# Altium PCB ICAN-7006-US.PcbDoc
Units mm, origin at the board's own origin, x right, y up, seen from the top; angles counter-clockwise.
Board outline 150 x 80 mm, 2 copper layers (Top Layer, Bottom Layer); 47 components, 131 nets, 346 pads, 0 vias.
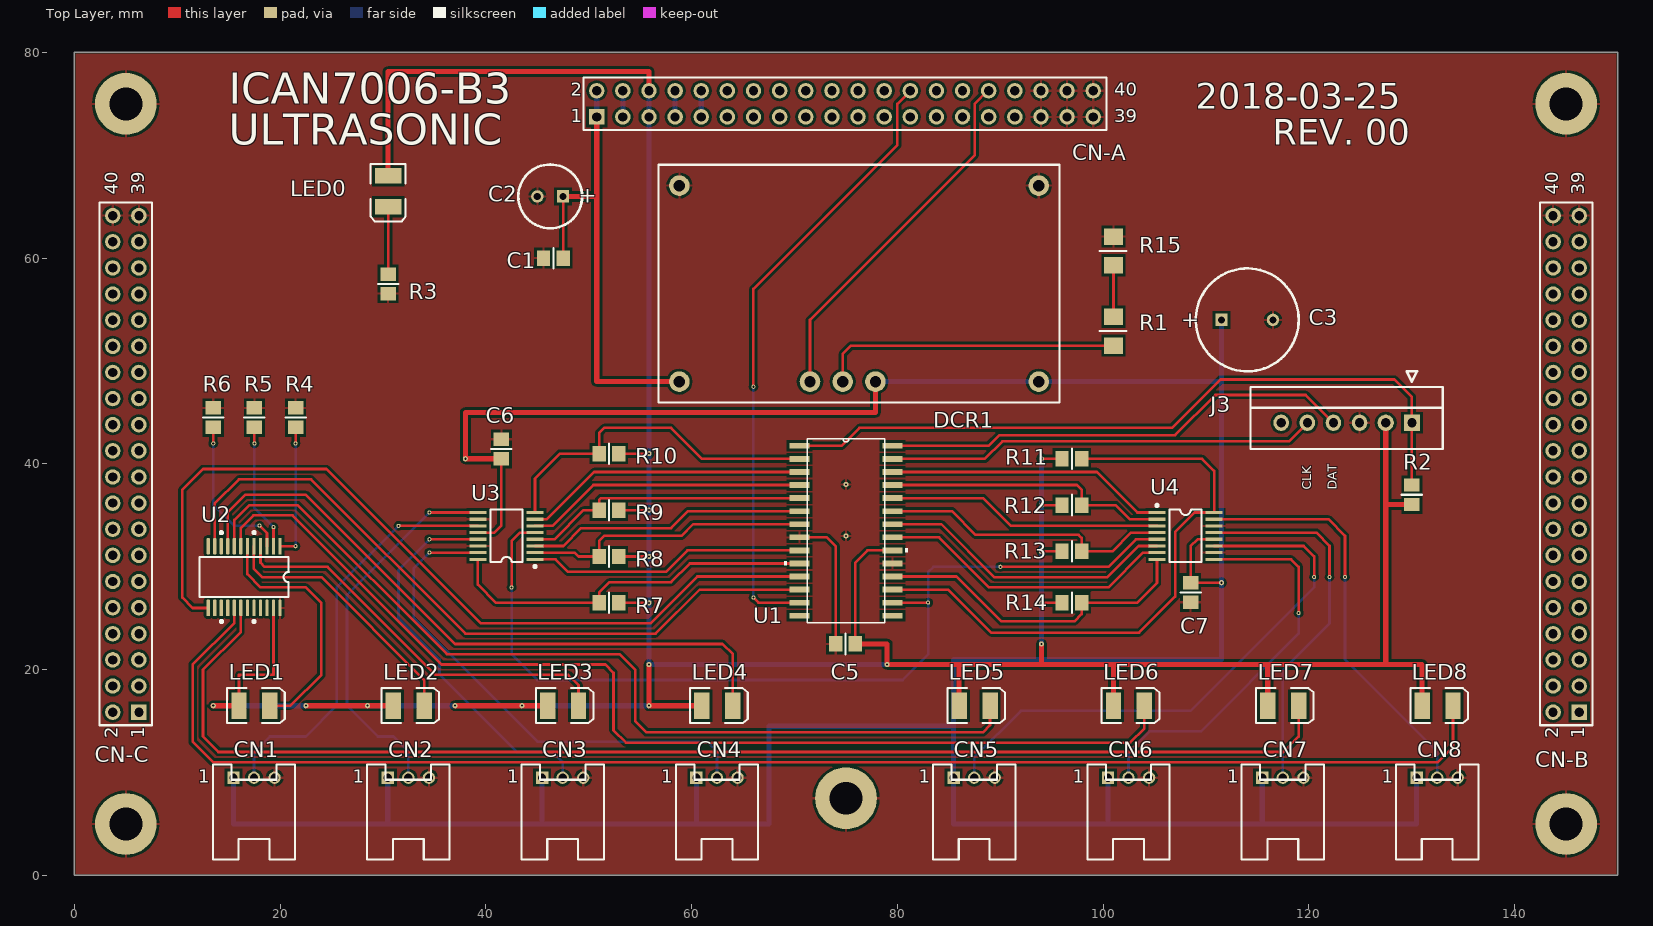
[diagram p0: Top Layer view]
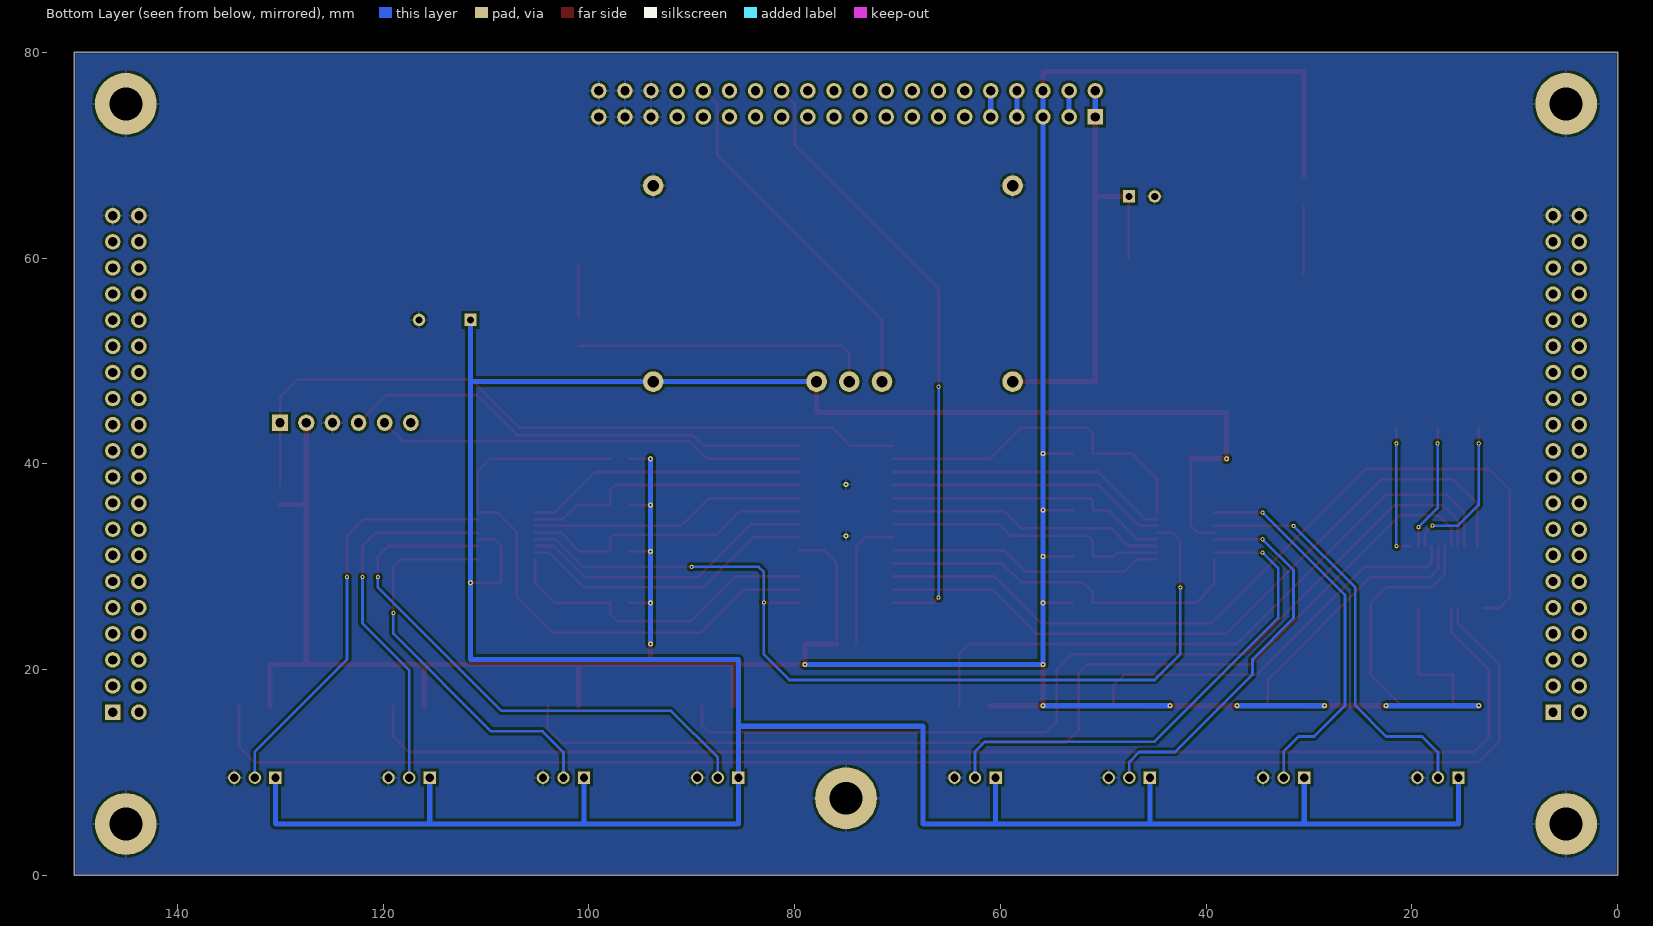
[diagram p1: Bottom Layer view, seen from below]

## Layer stack, top to bottom
Top Layer: signal copper 0.0356
Dielectric: dielectric 0.32, FR-4, Dk 4.8
Bottom Layer: signal copper 0.0356

## Board outline
0,0 0,80 150,80 150,0

## Design rules (kind name [scope] priority, off if disabled: settings)
Clearance [All] p1: gap=0.254
ComponentClearance [All] p1: gap=0.254 collisioncheckmode=3 verticalgap=0.254
HoleSize [All] p1: absolutevalues=TRUE maxlimit=8 minlimit=0.025 maxpercent=80.000 minpercent=20.000
PolygonConnect [All] p1: connectstyle=Relief reliefconductorwidth=0.254 reliefentries=4 polygonreliefangle="90 Angle"
RoutingVias [All] p1: holewidth=0.2 width=0.4 viastyle="Through Hole" minholewidth=0.2 minwidth=0.4 maxholewidth=2 maxwidth=2
SolderMaskExpansion [All] p1: expansion=0.102
TestPointUsage [All] p1: valid=0 allowmultiple=FALSE
Testpoint [All] p1: side=15 testpointundercomponent=TRUE minsize=1.016 maxsize=2.54 preferedsize=1.524 minholesize=0 maxholesize=1.016 preferedholesize=0.813 testpointgrid=0.025 style=1023 order=0123456789
Width [All] p1: maxlimit=2 minlimit=0.2 preferedwidth=0.254
17 further rules are at their usual default settings.

## Components (designator, comment, footprint, x,y, rotation, side; value= is the part's Value field where it differs from the comment)
C1 "100nF" [0805]2012 46.55,60 r0 top
C2 "47uF/25V" "CAPA MH5 PITCH2.5MM" 46.25,66 r180 top
C3 "330uF/25V" "CAPA WXA PITCH 5.0MM" 114,54 r0 top
C5 "0.1uF" [0805]2012 74.95,22.5 r0 top
C6 "100nF" [0805]2012 41.5,41.45 r270 top
C7 "100nF" [0805]2012 108.5,27.5 r270 top
CN1 "HY 3P" HY-3AW 17.46,9.5 r0 top
CN2 "HY 3P" HY-3AW 32.46,9.5 r0 top
CN3 "HY 3P" HY-3AW 47.46,9.5 r0 top
CN4 "HY 3P" HY-3AW 62.46,9.5 r0 top
CN5 "HY 3P" HY-3AW 87.46,9.5 r0 top
CN6 "HY 3P" HY-3AW 102.46,9.5 r0 top
CN7 "HY 3P" HY-3AW 117.46,9.5 r0 top
CN8 "HY 3P" HY-3AW 132.46,9.5 r0 top
CN-A "25-1201-220" HDR2X20 50.77,73.73 r0 top locked
CN-B "25-1201-220" HDR2X20 146.27,15.87 r90 top locked
CN-C "25-1201-220" HDR2X20 6.27,15.87 r90 top locked
DCR1 "PTN78020W" PTN78020 58.8,67.05 r0 top
J3 "C3" C3-S6 130,44 r0 top
LED0 "RED" 3.5X2.8X1.9 30.5,66.5 r270 top
LED1 "GREEN" 3.5X2.8X1.9 17.5,16.5 r0 top
LED2 "GREEN" 3.5X2.8X1.9 32.5,16.5 r0 top
LED3 "GREEN" 3.5X2.8X1.9 47.5,16.5 r0 top
LED4 "GREEN" 3.5X2.8X1.9 62.5,16.5 r0 top
LED5 "GREEN" 3.5X2.8X1.9 87.5,16.5 r0 top
LED6 "GREEN" 3.5X2.8X1.9 102.5,16.5 r0 top
LED7 "GREEN" 3.5X2.8X1.9 117.5,16.5 r0 top
LED8 "GREEN" 3.5X2.8X1.9 132.5,16.5 r0 top
R1 "720,1/4W" [1206]3216 101,52.9 r270 top
R2 "10k,1/8W" [0805]2012 130,37 r90 top
R3 "330,1/8W" [0805]2012 30.5,57.5 r270 top
R4 "2.2k,1/8W" [0805]2012 21.5,44.5 r270 top
R5 "2.2k,1/8W" [0805]2012 17.5,44.5 r270 top
R6 "2.2k,1/8W" [0805]2012 13.5,44.5 r270 top
R7 "10k,1/8W" [0805]2012 51.95,26.5 r0 top
R8 "10k,1/8W" [0805]2012 51.95,31 r0 top
R9 "10k,1/8W" [0805]2012 51.95,35.5 r0 top
R10 "10k,1/8W" [0805]2012 51.95,41 r0 top
R11 "10k,1/8W" [0805]2012 96.95,40.5 r180 top
R12 "10k,1/8W" [0805]2012 96.95,36 r180 top
R13 "10k,1/8W" [0805]2012 96.95,31.5 r180 top
R14 "10k,1/8W" [0805]2012 96.95,26.5 r180 top
R15 "12,1/4W" [1206]3216 101,60.7 r270 top
U1 "PIC16F1516-I/SO" SOIC28-W_MC 75,33.5 r0 top
U2 "MY9221SS" "SSOP 24" 16.5,29 r270 top
U3 "E521.50" RU-16 42,33 r90 top
U4 "E521.50" RU-16 108,33 r270 top

## Footprints (in the part's own frame and the unit in brackets; to place one, negate y for a bottom-side part, rotate by r counter-clockwise, add the part's x,y. Pads: shape width x height; smd on the part's side, far side on the other; paste and mask are expansions set on the pad)
3.5X2.8X1.9 [mm] "SM LED; 2 C-Bend Leads; Body 3.5 x 2.8 x 1.9 mm, inc leads (LxWxH typ)"
  rect 1.5x2.6 smd: 1(-1.5,0) 2(1.5,0)
  silkscreen extent -2.65,-1.7 2.95,1.7
[0805]2012 [mm] "SMD 2.0x1.25"
  rect 1.3x1.5 smd: 1(-0.95,0) 2(0.95,0)
  silkscreen extent 0,-1 0,1
[1206]3216 [mm] "SMD 3.2x1.6"
  rect 1.6x1.8 smd: 1(-1.4,0) 2(1.4,0)
  silkscreen extent 0,-1.35 0,1.25
C3-S6 [mm] "2.54"
  rect 1.575x1.575 hole 0.89: 1(0,0)
  round 1.575 hole 0.89: 2(-2.54,0)
  oval 1.5x1.575 hole 0.89: 3(-5.08,0) 4(-7.62,0) 5(-10.16,0) 6(-12.7,0)
  silkscreen extent -15.7,-2.54 3,5
"CAPA MH5 PITCH2.5MM" [mm] "Capacitor, Electrolytic, Radial; Body 6.3 mm (Dia.xH typ); Pin Spacing 2.5 mm (typ)"
  rect 1.2x1.2 hole 0.7: 1(-1.25,0)
  round 1.2 hole 0.7: 2(1.25,0)
  silkscreen extent -3.1,-3.1 3.1,3.1
"CAPA WXA PITCH 5.0MM" [mm] "Capacitor, Electrolytic, Radial; Body 10 mm (Dia); Pin Spacing 5 mm (typ)"
  rect 1.2x1.2 hole 0.7: 1(-2.5,0)
  round 1.2 hole 0.7: 2(2.5,0)
  silkscreen extent -5,-5 5,5
HDR2X20 [mm] "Connector; Header; 20x2 Position"
  rect 1.5x1.5 hole 0.9: 1(0,0)
  round 1.5 hole 0.9: 2(0,2.54) 3(2.54,0) 4(2.54,2.54) 5(5.08,0) 6(5.08,2.54) 7(7.62,0) 8(7.62,2.54) 9(10.16,0) 10(10.16,2.54) 11(12.7,0) 12(12.7,2.54) 13(15.24,0) 14(15.24,2.54) 15(17.78,0) 16(17.78,2.54) 17(20.32,0) 18(20.32,2.54) 19(22.86,0) 20(22.86,2.54) 21(25.4,0) 22(25.4,2.54) 23(27.94,0) 24(27.94,2.54) 25(30.48,0) 26(30.48,2.54) 27(33.02,0) 28(33.02,2.54) 29(35.56,0) 30(35.56,2.54) 31(38.1,0) 32(38.1,2.54) 33(40.64,0) 34(40.64,2.54) 35(43.18,0) 36(43.18,2.54) 37(45.72,0) 38(45.72,2.54) 39(48.26,0) 40(48.26,2.54)
  silkscreen extent -1.27,-1.27 49.53,3.81
HY-3AW [mm] "YOLINK PHB CONNECTOR A2006-xxA 2.00mm"
  rect 1.2x1.2 hole 0.8: 1(-2,0)
  round 1.2 hole 0.8: 2(0,0) 3(2,0)
  silkscreen extent -4,-7.95 4,1.3
PTN78020 [mm] "REGURATOR Ti PTN78020W"
  round 2 hole 1.1: 1(0,0) 2(0,-19.05) 3(12.7,-19.05) 4(15.88,-19.05) 5(19.06,-19.05) 6(34.94,-19.05) 7(34.94,0)
  silkscreen extent -2.03,-21.08 36.96,2.03
RU-16 [mm] "Shrink Small Outline; 16 Leads; Body Width 4.4 mm; Pitch 0.65 mm"
  rect 0.3x1.65 smd: 1(-2.275,-2.775) 2(-1.625,-2.775) 3(-0.975,-2.775) 4(-0.325,-2.775) 5(0.325,-2.775) 6(0.975,-2.775) 7(1.625,-2.775) 8(2.275,-2.775) 9(2.275,2.775) 10(1.625,2.775) 11(0.975,2.775) 12(0.325,2.775) 13(-0.325,2.775) 14(-0.975,2.775) 15(-1.625,2.775) 16(-2.275,2.775)
  silkscreen extent -3.1,-2.9 2.55,1.55
SOIC28-W_MC [mil]
  rect 78x22 smd: 1(-178,325) 2(-178,275) 3(-178,225) 4(-178,175) 5(-178,125) 6(-178,75) 7(-178,25) 8(-178,-25) 9(-178,-75) 10(-178,-125) 11(-178,-175) 12(-178,-225) 13(-178,-275) 14(-178,-325) 15(178,-325) 16(178,-275) 17(178,-225) 18(178,-175) 19(178,-125) 20(178,-75) 21(178,-25) 22(178,25) 23(178,75) 24(178,125) 25(178,175) 26(178,225) 27(178,275) 28(178,325)
  silkscreen extent -237,-352 237,352
"SSOP 24" [mm] "BODY 3.91*8.66, PITCH 0.635mm"
  rect 1.6x0.32 smd: 1(-3,3.492)
  rrect50% 1.6x0.32 smd: 2(-3,2.857) 3(-3,2.222) 4(-3,1.587) 5(-3,0.952) 6(-3,0.317) 7(-3,-0.318) 8(-3,-0.953) 9(-3,-1.588) 10(-3,-2.223) 11(-3,-2.858) 12(-3,-3.493) 13(3,-3.492) 14(3,-2.857) 15(3,-2.222) 16(3,-1.587) 17(3,-0.952) 18(3,-0.317) 19(3,0.318) 20(3,0.953) 21(3,1.588) 22(3,2.223) 23(3,2.858)
  rrect50% 1.6x0.3 smd: 24(3,3.493)
  silkscreen extent -4.44,-4.33 4.44,4.34

## Part data
C1 C5 C6 C7: library part Cap, "Capacitor"
C2 C3: library part "Cap Pol2", "Polarized Capacitor (Axial)"
CN1 CN2 CN3 CN4 CN5 CN6 CN7 CN8: library part "Header 3", "Header, 3-Pin"
CN-A CN-B: library part "Header 25X2", "Header, 25-Pin, Dual row"
CN-C: library part "Header 20X2", "Header, 20-Pin, Dual row"
DCR1: library part PTN78020
J3: library part "Header 6", "Header, 6-Pin"
LED0 LED1 LED2 LED3 LED4 LED5 LED6 LED7 LED8: library part LED3, "Typical BLUE SiC LED"
R1 R2 R3 R4 R5 R6 R7 R8 R9 R10 R11 R12 R13 R14 R15: library part Res1, "Resistor"
U1: library part PIC16F1516-x_SO, "Imported"
U2: library part IC24
U3 U4: library part IC16

## Free pads (board coordinates)
  round 6 hole 3.2: 0(5,5) 0(5,75) 0(75,7.5) 0(145,5) 0(145,75)
  round 0.5 hole 0.2: 0(13.5,16.5) 0(22.5,16.5) 0(28.5,16.5) 0(37,16.5) 0(38,40.5) 0(43.5,16.5) 0(55.85,20.5) 0(55.85,26.5) 0(55.85,31) 0(55.85,35.5) 0(55.85,41) 0(55.85,16.5) 0(75,33) 0(75,38) 0(79,20.5) 0(94,22.5) 0(94,26.5) 0(94,31.5) 0(94,36) 0(94,40.5) 0(111.5,28.45)
  round 0.4 hole 0.2: 0(13.5,42) 0(17.5,42) 0(18,34) 0(19.358,33.858) 0(21.5,32) 0(21.5,42) 0(31.5,33.975) 0(34.5,31.375) 0(34.5,32.675) 0(34.5,35.275) 0(42.5,28) 0(66,27) 0(66,47.5) 0(82.985,26.515) 0(90,30) 0(119,25.5) 0(120.5,29) 0(122,29) 0(123.5,29)

## Nets (pads, with @x,y where several pads share a name; then routed paths per layer and width w, separated by ;. In a path a pad name is that pad's centre, name@x,y a point inside that pad or via, vN(x,y) a via of type N, cw(c..) or ccw(c..) an arc to the next point about the centre after c; other vN are vias at no path point)
*LIGHT_ON: CN-A.33
*MF-DIR: CN-B.3
*MF-ENB: CN-B.5
*ML-ALM: CN-C.8
*ML-BRAKE: CN-B.10
*ML-ENB: CN-B.12
*ML-F/*R: CN-B.8
*ML-PG: CN-C.6
*MLL-PG_B: CN-C.12
*MLL-PG_F: CN-C.10
*MLR-PG_B: CN-C.11
*MLR-PG_F: CN-C.9
*MOTOR_ON1: CN-A.29
*MOTOR_ON2: CN-A.31
*MR-ALM: CN-C.7
*MR-BRAKE: CN-B.9
*MR-ENB: CN-B.11
*MR-F/*R: CN-B.7
*MR-PG: CN-C.5
*SNS-COVER: CN-C.19
*SNS-HOME_C: CN-C.3
*SNS-HOME_L: CN-C.2
*SNS-HOME_R: CN-C.1
*SNS-MIC_CLOSE: CN-C.4
*SNS-RAIN: CN-C.30
*SW-A/*M: CN-C.28
*SW-BRAKE: CN-C.27
*SW-EMERGENCY: CN-A.25
*SW-LUG-B_OR: CN-C.24
*SW-LUG-B_POS: CN-C.22
*SW-LUG-CENTER: CN-C.20
*SW-LUG-F_OR: CN-C.23
*SW-LUG-F_POS: CN-C.21
*SW-LUG_DN: CN-C.34
*SW-LUG_UP: CN-C.32
*SW-MLL_CLOSE: CN-C.16
*SW-MLL_OPEN: CN-C.18
*SW-MLR_CLOSE: CN-C.15
*SW-MLR_OPEN: CN-C.17
*SW-SEAT: CN-C.29
*SW_CLOSE: CN-C.26
*SW_FORWORD: CN-C.31
*SW_OPEN: CN-C.25
+24V: C1.2 C2.1 CN-A.1 CN-A.2 DCR1.2 | length 45.6
  Top Layer w0.254: C1.2 C2.1
  Top Layer w0.5: C2.1 50.77,66 ; CN-A.1 50.77,48 DCR1.2
  Bottom Layer w0.5: CN-A.1 CN-A.2
AD-48V: CN-C.13
AD-ACC: CN-C.14
AD-TEMP: CN-C.33
DC3.3V: CN-A.7 CN-A.8 | length 2.5
  Bottom Layer w0.5: CN-A.7 CN-A.8
DC5V: C5.2 CN-A.5 CN-A.6 J3.2 LED0.1 LED1.1 LED2.1 LED3.1 LED4.1 LED5.1 LED6.1 LED7.1 LED8.1 pad.0@13.5,16.5 pad.0@22.5,16.5 pad.0@28.5,16.5 pad.0@37,16.5 pad.0@43.5,16.5 pad.0@55.85,16.5 pad.0@55.85,20.5 pad.0@55.85,26.5 pad.0@55.85,31 pad.0@55.85,35.5 pad.0@55.85,41 pad.0@79,20.5 pad.0@94,22.5 pad.0@94,26.5 pad.0@94,31.5 pad.0@94,36 pad.0@94,40.5 R2.1 R7.2 R8.2 R9.2 R10.2 R11.2 R12.2 R13.2 R14.2 U1.20 U2.23 | length 339.1
  Top Layer w0.254: LED1.1 16,19.5 19.358,19.5 U2.23 ; R7.2 pad.0@55.85,26.5 ; R8.2 pad.0@55.85,31 ; R9.2 pad.0@55.85,35.5 ; R10.2 pad.0@55.85,41 ; C5.2 75.9,30.4 77.095,31.595 U1.20 ; pad.0@94,26.5 R14.2 ; pad.0@94,31.5 R13.2 ; pad.0@94,36 R12.2 ; pad.0@94,40.5 R11.2
  Top Layer w0.5: pad.0@13.5,16.5 LED1.1 ; pad.0@22.5,16.5 LED2.1 ; LED0.1 30.5,78.15 55.85,78.15 CN-A.6 ; pad.0@37,16.5 LED3.1 ; pad.0@55.85,20.5 55.85,16.5 LED4.1 ; C5.2 79,22.5 79,20.5 131,20.5 LED8.1 ; LED5.1 86,20.5 ; 94,20.5 pad.0@94,22.5 ; LED6.1 101,20.5 ; LED7.1 116,20.5 ; 127.46,20.5 J3.2 ; 127.51,36.05 R2.1
  Bottom Layer w0.5: pad.0@13.5,16.5 pad.0@22.5,16.5 ; pad.0@28.5,16.5 pad.0@37,16.5 ; pad.0@43.5,16.5 pad.0@55.85,16.5 ; CN-A.6 55.85,20.5 pad.0@79,20.5 ; pad.0@94,22.5 pad.0@94,40.5
DC12V: CN-A.3 CN-A.4 | length 2.5
  Bottom Layer w0.5: CN-A.3 CN-A.4
GND: C1.1 C2.2 C3.2 C5.1 C6.1 C7.2 CN1.3 CN2.3 CN3.3 CN4.3 CN5.3 CN6.3 CN7.3 CN8.3 CN-A.35 CN-A.36 CN-A.37 CN-A.38 CN-A.39 CN-A.40 CN-B.39 CN-B.40 CN-C.39 CN-C.40 DCR1.1 DCR1.7 J3.3 pad.0@5,5 pad.0@5,75 pad.0@75,7.5 pad.0@75,33 pad.0@75,38 pad.0@145,5 pad.0@145,75 R3.2 R4.1 R5.1 R6.1 R15.1 U1.8 U1.19 U2.24 U3.10 U3.14 U4.10 U4.14 | length 13.4
  Top Layer w0.254: U1.8 73.135,32.865 74,32 C5.1
I2C_CLK: U1.14
I2C_DAT: U1.15
I2C_SCL: CN-A.18
I2C_SCL2: CN-A.20
I2C_SDA: CN-A.17
I2C_SDA2: CN-A.19
ICSPCLK: J3.5 U1.27 | length 41.8
  Top Layer w0.254: U1.27 88.485,40.485 90.2,42.2 118.04,42.2 J3.5
ICSPDAT: J3.4 U1.28 | length 46
  Top Layer w0.254: U1.28 88.855,41.755 89.9,42.8 107,42.8 110.9,46.7 119.68,46.7 J3.4
LUG-BRAKE: CN-B.23
LUG-PWM1: CN-B.19
LUG-PWM2: CN-B.21
MCLR: J3.1 R2.2 U1.1 | length 71.4
  Top Layer w0.254: U1.1 74.555,41.755 76.3,43.5 106.7,43.5 111.4,48.2 128.3,48.2 130,46.5 R2.2
MF-PWM: CN-B.1
MIC-MOTOR: CN-B.25
ML-PWM: CN-B.14
MLL-PWM1: CN-B.16
MLL-PWM2: CN-B.18
MLR-PWM1: CN-B.15
MLR-PWM2: CN-B.17
MR-PWM: CN-B.13
NetCN1_2: CN1.2 pad.0@31.5,33.975 U3.11 | length 40.1
  Top Layer w0.254: pad.0@31.5,33.975 U3.11
  Bottom Layer w0.254: CN1.2 17.46,11.96 19,13.5 22.5,13.5 25.5,16.5 25.5,27.975 pad.0@31.5,33.975
NetCN2_2: CN2.2 pad.0@34.5,35.275 U3.9 | length 37.2
  Top Layer w0.254: pad.0@34.5,35.275 U3.9
  Bottom Layer w0.254: CN2.2 32.46,12.04 31,13.5 29.5,13.5 26.5,16.5 26.5,27.275 pad.0@34.5,35.275
NetCN3_2: CN3.2 pad.0@34.5,32.675 U3.13 | length 37.8
  Top Layer w0.254: pad.0@34.5,32.675 U3.13
  Bottom Layer w0.254: pad.0@34.5,32.675 31.5,29.675 31.5,25 35.49,21.01 35.49,19.51 43,12 46.5,12 47.46,11.04 CN3.2
NetCN4_2: CN4.2 pad.0@34.5,31.375 U3.15 | length 49.1
  Top Layer w0.254: pad.0@34.5,31.375 U3.15
  Bottom Layer w0.254: pad.0@34.5,31.375 33,29.875 33,25 45,13 61.5,13 62.46,12.04 CN4.2
NetCN5_2: CN5.2 pad.0@120.5,29 U4.11 | length 55
  Top Layer w0.254: U4.11 119.475,32.025 120.5,31 pad.0@120.5,29
  Bottom Layer w0.254: CN5.2 87.46,11.46 92,16 108.5,16 120.5,28 pad.0@120.5,29
NetCN6_2: CN6.2 pad.0@119,25.5 U4.9 | length 38.8
  Top Layer w0.254: U4.9 118.275,30.725 119,30 pad.0@119,25.5
  Bottom Layer w0.254: CN6.2 102.46,11.96 104.5,14 109.5,14 119,23.5 pad.0@119,25.5
NetCN7_2: CN7.2 pad.0@122,29 U4.13 | length 36.2
  Top Layer w0.254: U4.13 120.715,33.325 122,32.04 pad.0@122,29
  Bottom Layer w0.254: CN7.2 117.46,19.96 122,24.5 pad.0@122,29
NetCN8_2: CN8.2 pad.0@123.5,29 U4.15 | length 40.6
  Top Layer w0.254: U4.15 121.875,34.625 123.5,33 pad.0@123.5,29
  Bottom Layer w0.254: pad.0@123.5,29 123.5,21 132.46,12.04 CN8.2
NetDCR1_4: DCR1.4 R1.2 | length 29.3
  Top Layer w0.254: DCR1.4 74.68,50.68 75.5,51.5 R1.2
NetLED0_2: LED0.2 R3.1 | length 6.5
  Top Layer w0.254: R3.1 LED0.2
NetLED1_2: LED1.2 U2.6 | length 24.3
  Top Layer w0.254: U2.6 16.818,29.282 18.1,28 22.5,28 24,26.5 24,19.5 21,16.5 LED1.2
NetLED2_2: LED2.2 U2.5 | length 25.7
  Top Layer w0.254: U2.5 17.453,29.798 18.25,29 24,29 34,19 LED2.2
NetLED3_2: LED3.2 U2.4 | length 39.4
  Top Layer w0.254: U2.4 18.088,30.4 18.487,30 24.6,30 35.1,19.5 48,19.5 49,18.5 LED3.2
NetLED4_2: LED4.2 U2.9 | length 64.5
  Top Layer w0.254: U2.9 14.913,35.312 16.6,37 22.5,37 37,22.5 63,22.5 64,21.5 LED4.2
NetLED5_2: LED5.2 U2.8 | length 90.9
  Top Layer w0.254: U2.8 15.548,34.548 17,36 21.7,36 36.2,21.5 53,21.5 54.5,20 54.5,15 55.6,13.9 88.3,13.9 89,14.6 LED5.2
NetLED6_2: LED6.2 U2.7 | length 105.3
  Top Layer w0.254: U2.7 16.183,33.783 17.4,35 21.2,35 35.7,20.5 51.6,20.5 52.4,19.7 52.4,14.1 53.6,12.9 102.6,12.9 104,14.3 LED6.2
NetLED7_2: LED7.2 U2.18 | length 124.8
  Top Layer w0.254: U2.18 16.183,23.683 12.5,20 12.5,13.5 14,12 117.5,12 119,13.5 LED7.2
NetLED8_2: LED8.2 U2.17 | length 142.6
  Top Layer w0.254: U2.17 15.548,24.547 11.5,20.5 11.5,13 13.5,11 132.5,11 134,12.5 LED8.2
NetR1_1: R1.1 R15.2 | length 5
  Top Layer w0.254: R1.1 R15.2
NetR4_2: pad.0@21.5,32 pad.0@21.5,42 R4.2 U2.1 | length 13.1
  Top Layer w0.254: U2.1 pad.0@21.5,32 ; pad.0@21.5,42 R4.2
  Bottom Layer w0.254: pad.0@21.5,32 pad.0@21.5,42
NetR5_2: pad.0@17.5,42 pad.0@19.358,33.858 R5.2 U2.2 | length 12.3
  Top Layer w0.254: pad.0@17.5,42 R5.2 ; U2.2 pad.0@19.358,33.858
  Bottom Layer w0.254: pad.0@17.5,42 17.5,35.715 pad.0@19.358,33.858
NetR6_2: pad.0@13.5,42 pad.0@18,34 R6.2 U2.3 | length 15.2
  Top Layer w0.254: pad.0@13.5,42 R6.2 ; pad.0@18,34 18.723,33.278 U2.3
  Bottom Layer w0.254: pad.0@13.5,42 13.5,36 15.5,34 pad.0@18,34
NetU1_11: U1.11 U2.13 | length 82.3
  Top Layer w0.254: U2.13 11.5,26 10.5,27 10.5,37.5 12.5,39.5 24.5,39.5 39.5,24.5 56,24.5 60.555,29.055 U1.11
NetU1_12: U1.12 U2.11 | length 69.9
  Top Layer w0.254: U2.11 13.643,36.143 16,38.5 23,38.5 38,23.5 56.5,23.5 60.785,27.785 U1.12
NetU1_16: pad.0@42.5,28 pad.0@82.985,26.515 pad.0@90,30 U1.16 U3.5 U4.5 | length 91.2
  Top Layer w0.254: pad.0@42.5,28 42.5,32.5 43.325,33.325 U3.5 ; U1.16 pad.0@82.985,26.515 ; pad.0@90,30 100.5,30 103.175,32.675 U4.5
  Bottom Layer w0.254: pad.0@42.5,28 42.5,21.5 45,19 80.5,19 82.985,21.485 82.985,29.485 83.5,30 pad.0@90,30
PCM-CK: CN-B.35
PCM-DI: CN-B.34
PCM-DO: CN-B.33
PCM-SYNC: CN-B.36
SNS-BRAKE_CURR: CN-C.36
SNS-LUG-CURR: CN-C.37
SNS-MLL_CURR: CN-C.38
SNS-MLR_CURR: CN-C.35
UART-CB_RX: CN-A.22
UART-CB_TX: CN-A.21
US1-ECHO: R9.1 U1.5 U3.4 | length 27.9
  Top Layer w0.254: U3.4 46.675,32.675 49.5,35.5 R9.1 51,36.5 51.175,36.675 U1.5
US1-TRIG: U1.3 U3.7 | length 27.6
  Top Layer w0.254: U3.7 45.925,34.625 50.515,39.215 U1.3
US2-ECHO: R10.1 U1.2 U3.8 | length 33.5
  Top Layer w0.254: U3.8 44.775,38.575 47.2,41 R10.1 51,43 51.5,43.5 58,43.5 61.015,40.485 U1.2
US2-TRIG: U1.4 U3.6 | length 27.3
  Top Layer w0.254: U3.6 46.475,33.975 50.445,37.945 U1.4
US3-ECHO: R8.1 U1.7 U3.2 | length 28
  Top Layer w0.254: U3.2 48.625,31.375 49,31 R8.1 51,32.5 51.5,33 59,33 60.135,34.135 U1.7
US3-TRIG: U1.6 U3.3 | length 27.1
  Top Layer w0.254: U3.3 47.525,32.025 49.25,33.75 58,33.75 59.655,35.405 U1.6
US4-ECHO: R7.1 U1.10 U3.16 | length 36.6
  Top Layer w0.254: U3.16 39.225,28.275 41,26.5 R7.1 51,27.5 52,28.5 58,28.5 59.825,30.325 U1.10
US4-TRIG: U1.9 U3.1 | length 27.1
  Top Layer w0.254: U3.1 46.775,30.725 48,29.5 57.5,29.5 59.595,31.595 U1.9
US5-ECHO: R13.1 U1.23 U4.4 | length 28.8
  Top Layer w0.254: U1.23 85.295,35.405 87.6,33.1 97.6,33.1 97.9,32.8 R13.1 100.9,31.5 102.725,33.325 U4.4
US5-TRIG: U1.21 U4.7 | length 29.1
  Top Layer w0.254: U1.21 84.035,32.865 88.9,28 100.5,28 103.875,31.375 U4.7
US6-ECHO: R14.1 U1.18 U4.8 | length 32
  Top Layer w0.254: U1.18 85.745,29.055 90.1,24.7 97.2,24.7 97.9,25.4 R14.1 103.3,26.5 105.225,28.425 U4.8
US6-TRIG: U1.22 U4.6 | length 29.1
  Top Layer w0.254: U1.22 84.265,34.135 89.4,29 100.4,29 103.425,32.025 U4.6
US7-ECHO: R12.1 U1.25 U4.2 | length 28
  Top Layer w0.254: U1.25 97.455,37.945 97.9,37.5 R12.1 101.2,36 102.575,34.625 U4.2
US7-TRIG: U1.24 U4.3 | length 26.8
  Top Layer w0.254: U1.24 88.325,36.675 91.025,33.975 U4.3
US8-ECHO: R11.1 U1.17 U4.16 | length 58.9
  Top Layer w0.254: U1.17 84.915,27.785 89.1,23.6 103.5,23.6 107,27.1 107,33.4 108.875,35.275 U4.16 110.775,39.325 109.6,40.5 R11.1
US8-TRIG: U1.26 U4.1 | length 27.3
  Top Layer w0.254: U1.26 99.385,39.215 103.325,35.275 U4.1
US-VDD: C3.1 C6.2 C7.1 CN1.1 CN2.1 CN3.1 CN4.1 CN5.1 CN6.1 CN7.1 CN8.1 DCR1.5 DCR1.6 pad.0@38,40.5 pad.0@111.5,28.45 U3.12 U4.12 | length 333.7
  Top Layer w0.254: U3.12 40.825,33.325 41.5,34 C6.2 ; U4.12 109.175,32.675 108.5,32 C7.1 pad.0@111.5,28.45
  Top Layer w0.5: C6.2 38,40.5 38,45 77.86,45 DCR1.5
  Bottom Layer w0.5: CN1.1 15.46,5 67.5,5 67.5,14.5 85.46,14.5 ; 30.46,5 CN2.1 ; 45.46,5 CN3.1 ; 60.46,5 CN4.1 ; DCR1.5 111.5,48 ; 100.46,5 CN6.1 ; C3.1 111.5,21 85.46,21 85.46,5 130.46,5 CN8.1 ; 115.46,5 CN7.1
US_EMG: CN-A.26 pad.0@66,27 pad.0@66,47.5 U1.13 | length 60.3
  Top Layer w0.254: pad.0@66,27 66.485,26.515 U1.13 ; pad.0@66,47.5 66,57 80,71 80,75 81.25,76.25 CN-A.26
  Bottom Layer w0.254: pad.0@66,27 pad.0@66,47.5
US_POWER: CN-A.32 DCR1.3 | length 35.5
  Top Layer w0.254: DCR1.3 71.5,54 87.5,70 87.5,75 88.77,76.27 CN-A.32
USB_5V: CN-A.9 CN-A.10 | length 2.5
  Bottom Layer w0.5: CN-A.9 CN-A.10
USB_DM1: CN-A.11
USB_DM2: CN-A.12
USB_DP1: CN-A.13
USB_DP2: CN-A.14
USB_POWER: CN-A.30
pads on no net: CN-A.15 CN-A.16 CN-A.23 CN-A.24 CN-A.27 CN-A.28 CN-A.34 CN-B.2 CN-B.4 CN-B.6 CN-B.20 CN-B.22 CN-B.24 CN-B.26 CN-B.27 CN-B.28 CN-B.29 CN-B.30 CN-B.31 CN-B.32 CN-B.37 CN-B.38 J3.6 U2.10 U2.12 U2.14 U2.15 U2.16 U2.19 U2.20 U2.21 U2.22

## Polygon pours and split planes (outlines as drawn)
GND on Top Layer "Top Layer-No Net" (solid, pour order 1001): 0.127,0.127 149.873,0.127 149.873,79.873 0.127,79.873
GND on Bottom Layer "Bottom Layer-No Net" (solid, pour order 1000): 0.127,0.127 149.873,0.127 149.873,79.873 0.127,79.873

## Silkscreen, mask and mechanical layers (free items; w line width, h text height)
Top Overlay:
  text "ICAN7006-B3" at 15,75 h3
  text "2018-03-25" at 109,74.5 h2.5
  text "ULTRASONIC" at 15,71 h3
  text "REV. 00" at 116.5,71 h2.5
  text "CLK" at 120.5,37.5 h1.52 r90
  text "DAT" at 123,37.5 h1.52 r90
Mechanical 13:
  the board outline again, w0.254

## Text inside footprints (layer, text, board x,y; h text height)
C2: Top Overlay "+" at 50.75,66.7 h1.52 r180
C3: Top Overlay "+" at 107.6,53.3 h1.52
CN1: Top Overlay "1" at 12.06,9 h1.27
CN2: Top Overlay "1" at 27.06,9 h1.27
CN3: Top Overlay "1" at 42.06,9 h1.27
CN4: Top Overlay "1" at 57.06,9 h1.27
CN5: Top Overlay "1" at 82.06,9 h1.27
CN6: Top Overlay "1" at 97.06,9 h1.27
CN7: Top Overlay "1" at 112.06,9 h1.27
CN8: Top Overlay "1" at 127.06,9 h1.27
CN-A: Top Overlay "1" at 48.23,73.222 h1.27; Top Overlay "2" at 48.23,75.762 h1.27; Top Overlay "40" at 101.062,75.762 h1.27; Top Overlay "39" at 101.062,73.222 h1.27
CN-B: Top Overlay "1" at 146.778,13.33 h1.27 r90; Top Overlay "2" at 144.238,13.33 h1.27 r90; Top Overlay "40" at 144.238,66.162 h1.27 r90; Top Overlay "39" at 146.778,66.162 h1.27 r90
CN-C: Top Overlay "1" at 6.778,13.33 h1.27 r90; Top Overlay "2" at 4.238,13.33 h1.27 r90; Top Overlay "40" at 4.238,66.162 h1.27 r90; Top Overlay "39" at 6.778,66.162 h1.27 r90